# Altium PCB PCB.PcbDoc (part 2 of 3)
Units mil, origin at the board's own origin, x right, y up, seen from the top; angles counter-clockwise.
Board outline 3149.61 x 3937.01 mil, 2 copper layers (Top Layer, Bottom Layer); 240 components, 174 nets, 738 pads, 225 vias.
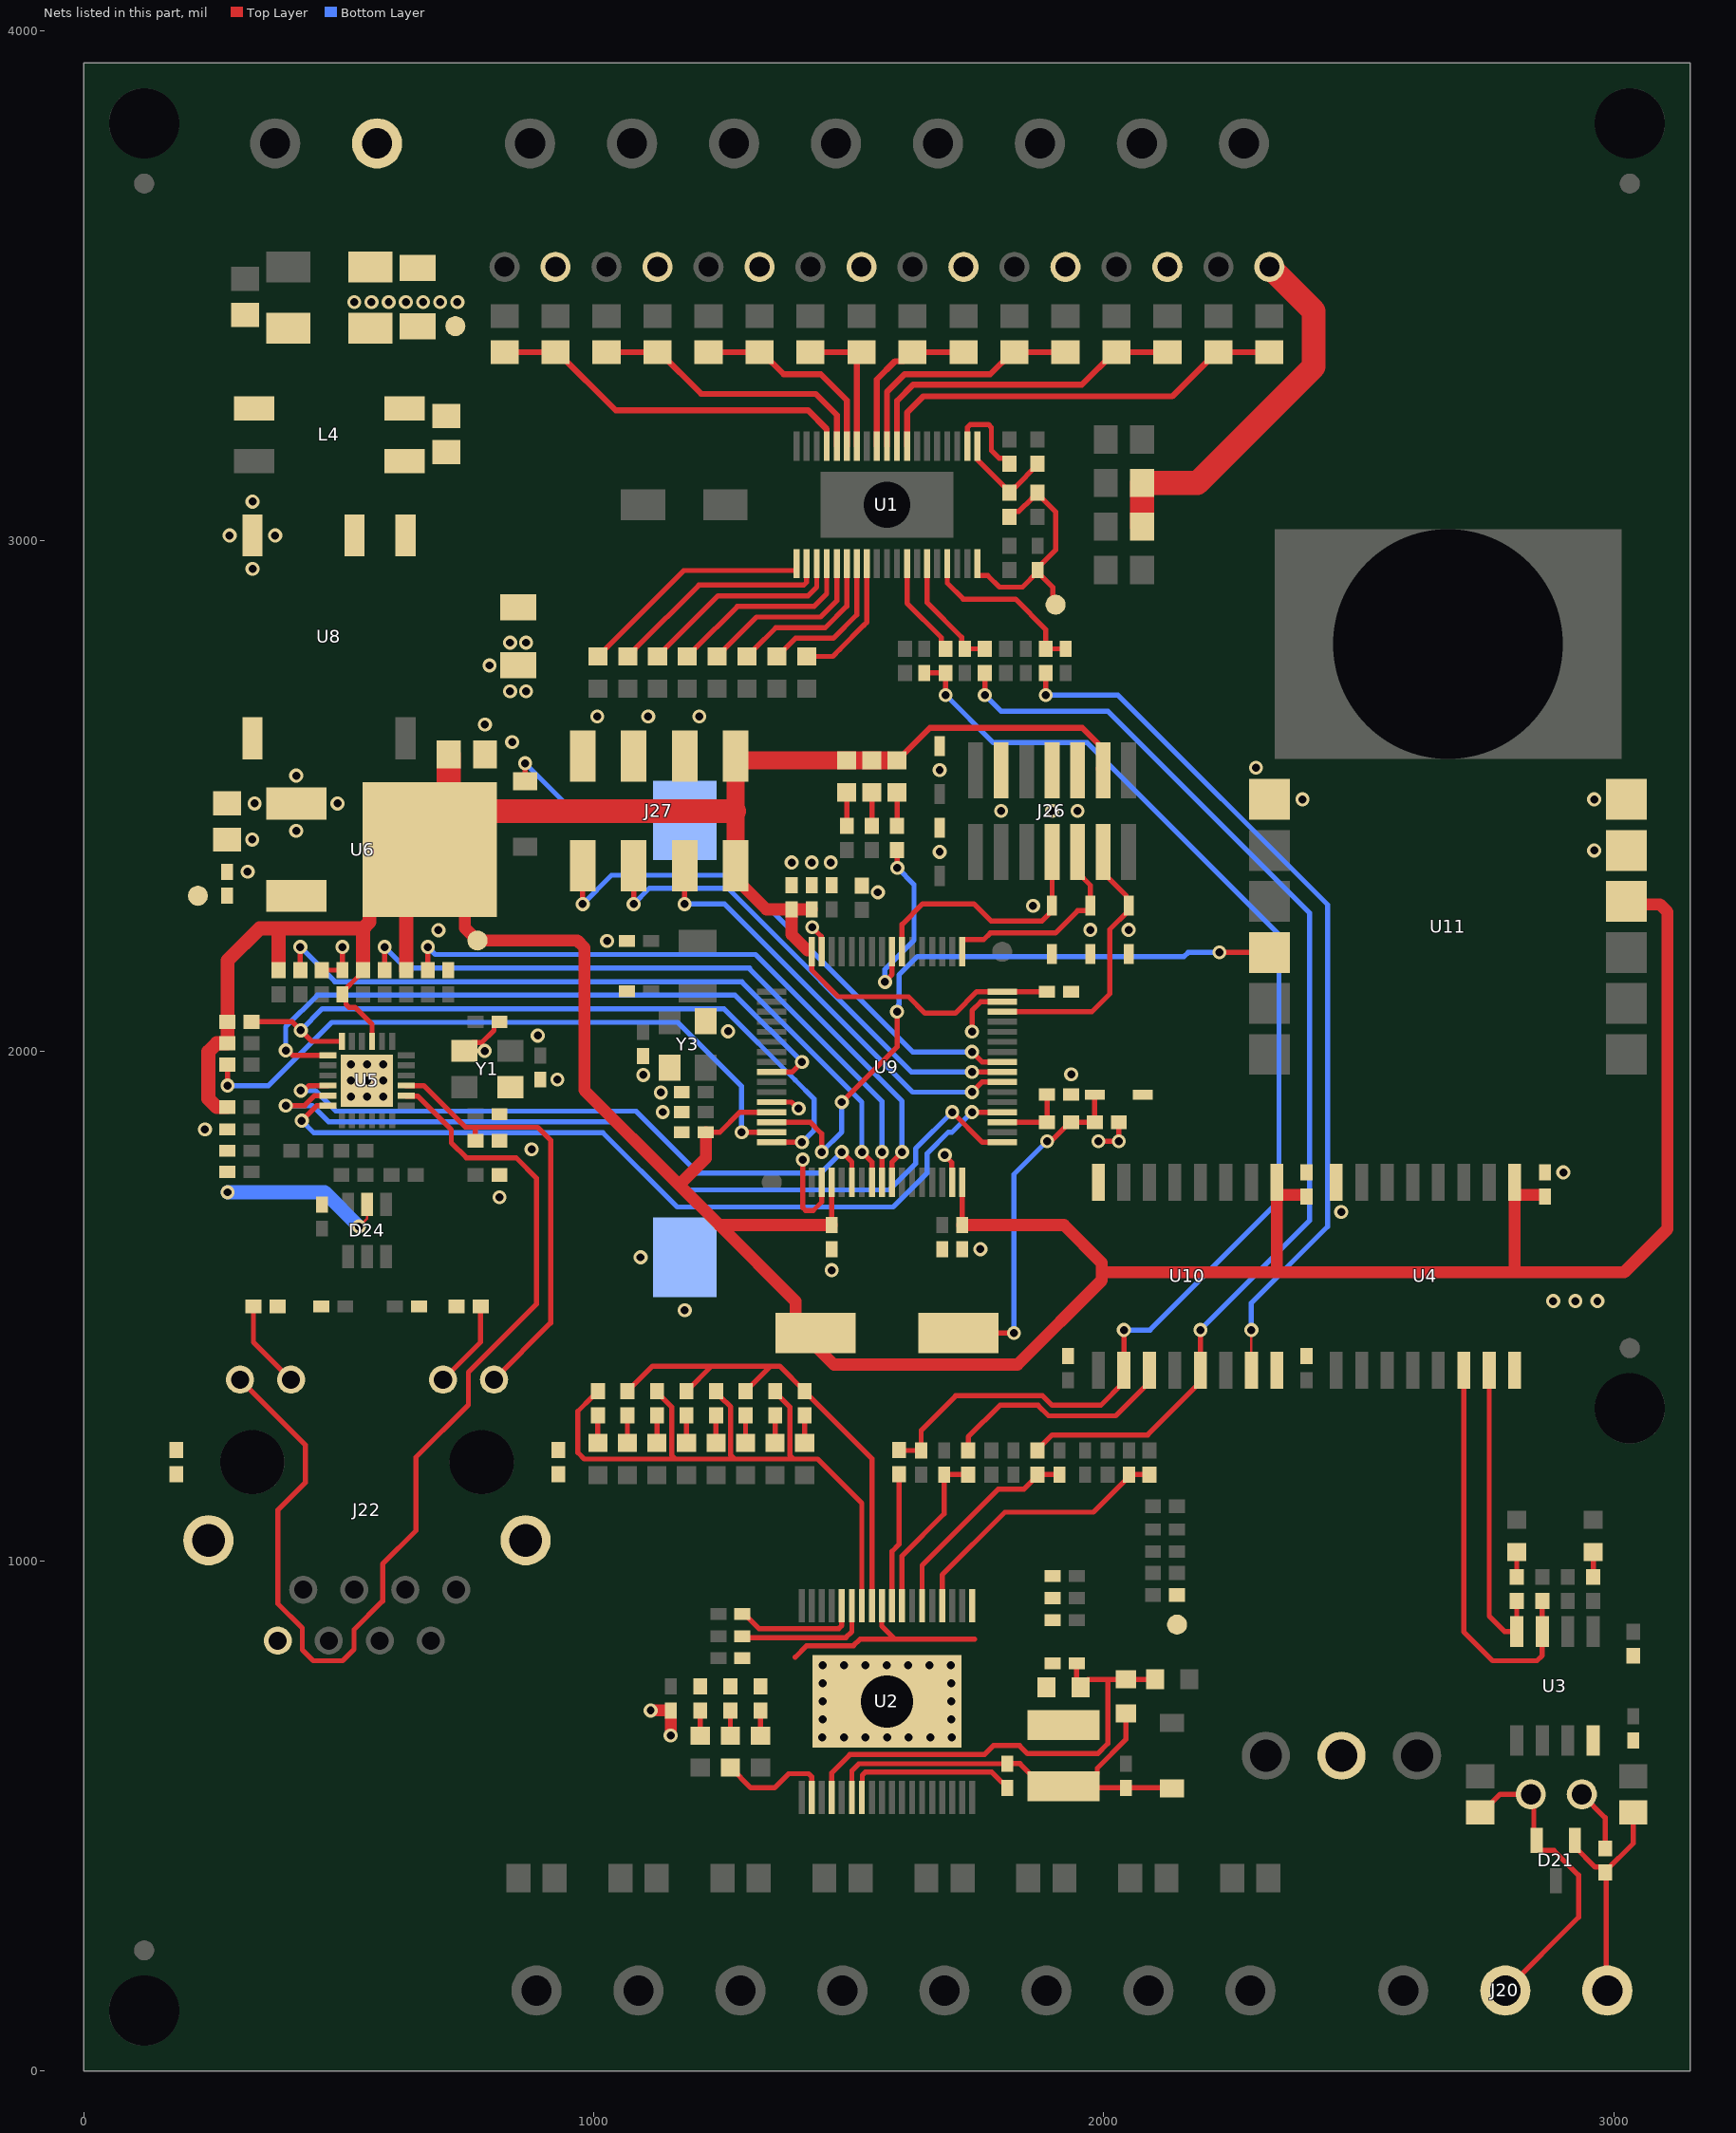
[diagram p2: the nets of this part, all layers, seen from the top]

## Part data (continued)
C77 C78: library part C-MLCC-2.2uF-25V-10%-0402, "Multilayer Ceramic Capacitors MLCC - SMD/SMT 25V 2.2uF X5R 0402 10% HI CV", JLCPCB Part #=C723363, Manufacturer=YAGEO, Part Number=CC0402KRX5R8BB225, Digikey Part #=13-CC0402KRX5R8BB225CT-ND, Mounting Type=SMT, Mouser Part #=603-CC0402KRX5R8B225
D1 D2 D3 D4 D5 D6 D7 D8 D13 D14 D15 D16 D17 D18 D19 D20 D22 D36: library part D-LED-GREEN-2V-20mA-0603, "Standard Single Color LEDs 0603 Green", JLCPCB Part #=C125094, Manufacturer=LITEON, Part Number=LTST-C190KGKT, Digikey Part #=160-1435-1-ND, Mounting Type=SMT, Mouser Part #=859-LTST-C190KGKT
D9 D10 D11 D34: library part D-LED-RED-2V-20mA-0603, "Standard Single Color LEDs 0603 Red", JLCPCB Part #=C94869, Manufacturer=LITEON, Part Number=LTST-C190KRKT, Digikey Part #=160-1436-1-ND, Mounting Type=SMT, Mouser Part #=859-LTST-C190KRKT
D12 D28: library part D-SCH-350mA-40V-SOD123, "Schottky Diodes & Rectifiers 350mA 40V SOD123", JLCPCB Part #=C181204, Manufacturer="Vishay Semiconductors", Part Number=SD103AW-E3-18, Digikey Part #=SD103AW-E3-18CT-ND, Mounting Type=SMT, Mouser Part #=78-SD103AW-E3-18
D21: library part D-CDSOT23-SM712, "ESD Protection Diodes / TVS Diodes SOT-23 7V400W Low Capacitance", JLCPCB Part #=C5122012, Manufacturer=Bourns, Part Number=CDSOT23-SM712, Digikey Part #=CDSOT23-SM712CT-ND, Mounting Type=SMT, Mouser Part #=652-CDSOT23-SM712
D23 D35: library part D-LED-YELLOW-2V-20mA-0603, "Standard Single Color LEDs 0603 Yellow", JLCPCB Part #=C125095, Manufacturer=LITEON, Part Number=LTST-C190KSKT, Digikey Part #=160-1437-1-ND, Mounting Type=SMT, Mouser Part #=859-LTST-C190KSKT
D24: library part D-USBLC6-4SC6, "ESD Protection Diodes / TVS Diodes Low Cap ESD Protect", JLCPCB Part #=C558419, Manufacturer=STMicroelectronics, Part Number=USBLC6-4SC6, Digikey Part #=497-4492-1-ND, Mounting Type=SMT, Mouser Part #=511-USBLC6-4SC6
D25 D26: library part D-SCH-2A-100V-SMA, "Schottky Diodes & Rectifiers 2A 100V SMA", JLCPCB Part #=C14996, Manufacturer=onsemi, Part Number=SSA210, Digikey Part #=SSA210CT-ND, Mounting Type=SMT, Mouser Part #=512-SSA210
D27: library part D-TVS-400W-26V-SMA-BI, "ESD Protection Diodes / TVS Diodes 400W 26V 5% Bi-Directional", JLCPCB Part #=C173517, Manufacturer=Littelfuse, Part Number=SMAJ26CA, Digikey Part #=18-SMAJ26CACT-ND, Mounting Type=SMT, Mouser Part #=576-SMAJ26CA
D29 D30 D31 D32 D33 D37: library part D-TVS-36W-3.3V-SOD323, "ESD Protection Diodes / TVS Diodes UNIDIRECTIONAL 3.3V ESD PR", JLCPCB Part #=C19829399, Manufacturer=onsemi, Part Number=ESD7351HT1G, Digikey Part #=ESD7351HT1GOSCT-ND, Mounting Type=SMT, Mouser Part #=863-ESD7351HT1G
F1: library part F-1206-10A-50V-SMT, "Surface Mount Fuses 1206 high-current met-foil. 10A", JLCPCB Part #=C136354, Manufacturer=Bourns, Part Number=SF-1206HH1000R-2, Digikey Part #=118-SF-1206HH1000R-2CT-ND, Mounting Type=SMT, Mouser Part #=652-SF-1206HH1000R-2
J1 J2 J3 J4 J5 J6 J7 J8 J21: library part J-02-2P54-HDR-M-VERT-TH, "Male straight header, 1 row, 2 positions, 2.54mm pitch, through-hole", JLCPCB Part #=C3324910, Manufacturer="Amphenol FCI", Part Number=10129378-902001BLF, Digikey Part #=10129378-902001BLF-ND, Mounting Type=THT, Mouser Part #=649-1012937890201BLF
J9 J10 J11 J12 J15 J16 J17 J18 J24: library part J-02-5P08-TERM-F-VERT-TH, "Pluggable Terminal Blocks 2 Pos 5.08mm pitch Through Hole Header", JLCPCB Part #=C8475, Manufacturer="Adam Tech", Part Number=EBA-02-D-BU-01, Digikey Part #=ED2609-ND, Mounting Type=THT, Mouser Part #=737-EBA-02-D-BU-01
J20: library part J-03-5P08-TERM-F-VERT-TH, "Pluggable Terminal Blocks 3 Pos 5.08mm pitch Through Hole Header", JLCPCB Part #=C8483, Manufacturer="Adam Tech", Part Number=EBA-03-D-BU-01, Digikey Part #=ED2610-ND, Mounting Type=THT, Mouser Part #=737-EBA-03-D-BU-01
J22: library part J-RJ45-1P-VERT-MAGJACK-SH-LED-THT, "Modular Ethernet Connector Jack (Female) 1x1 Shielded Through Hole With LEDs With Magnetics", JLCPCB Part #=C34677, Manufacturer=HANRUN, Part Number=HY951180A, Digikey Part #=535-12607-ND, Mounting Type=THT, Mouser Part #=815-ARJ07-111071A
J25: library part J-CR2032-H-SMT, "Coin Cell Battery Holders CR2032", JLCPCB Part #=C238070, Manufacturer="Keystone Electronics", Part Number=1061, Digikey Part #=36-1061-ND, Mounting Type=SMT, Mouser Part #=534-1061
J26: library part J-14-1P27-HDR-M-SH-SMT, "Male straight header, 2 row, 14 positions, 1.27mm pitch, SMD", JLCPCB Part #=C7465995, Manufacturer=SAMTEC, Part Number=FTSH-107-01-F-DV-K, Digikey Part #=612-FTSH-107-01-F-DV-K-ND, Mounting Type=SMT, Mouser Part #=200-FTSH10701FDVK
J27: library part J-8-2P54-HDR-M-VERT-SMT, "Male straight header, 2 row, 8 positions, 2.54mm pitch, SMD", JLCPCB Part #=C192300, Manufacturer="Amphenol FCI", Part Number=95278-101-08LF, Digikey Part #=609-5752-ND, Mounting Type=SMT, Mouser Part #=649-95278-101-08LF
L1: library part L-PWR-100uH-0.42A-SMT, "Power Inductors - SMD 100uH 0.42A 1.6Ohms", JLCPCB Part #=C83471, Manufacturer=Bourns, Part Number=SRN4018-101M, Digikey Part #=SRN4018-101MCT-ND, Mounting Type=SMT, Mouser Part #=652-SRN4018-101M
L2: library part L-FB-600R-100MHz-500mA-0402, "Ferrite Beads 600 OHM 25% Alternate Sizing Guide Below", JLCPCB Part #=C76886, Manufacturer="Murata Electronics", Part Number=BLM15AX601SN1D, Digikey Part #=490-5441-1-ND, Mounting Type=SMT, Mouser Part #=81-BLM15AX601SN1D
L4: library part L-CMC-10uH-1.6A-TH, "Common Mode Chokes / Filters WE-SL2 SMD Sectional 2x10uH 1600mA", JLCPCB Part #=C878356, Manufacturer="Wurth Elektronik", Part Number=744226S, Digikey Part #=732-1476-1-ND, Mounting Type=SMT, Mouser Part #=710-744226S
R1 R2 R5 R6 R7 R8 R9 R11: library part R-THICK-2K2-125mW-1%-0805, "Thick Film Resistors - SMD General Purpose Chip Resistor 0805, 2.2kOhms, 1%, 1/8W", JLCPCB Part #=C114561, Manufacturer=YAGEO, Part Number=RC0805FR-072K2L, Digikey Part #=311-2.20KCRCT-ND, Mounting Type=SMT, Mouser Part #=603-RC0805FR-072K2L
R3: library part R-THICK-1K-125mW-1%-0805, "Thick Film Resistors - SMD General Purpose Chip Resistor 0805, 1kOhms, 1%, 1/8W", JLCPCB Part #=C95781, Manufacturer=YAGEO, Part Number=RC0805FR-071KL, Digikey Part #=311-1.00KCRCT-ND, Mounting Type=SMT, Mouser Part #=603-RC0805FR-071KL
R4: library part R-THICK-51K-62.5mW-1%-0402, "Thick Film Resistors - SMD General Purpose Chip Resistor 0402, 51kOhms, 1%, 1/16W", JLCPCB Part #=C107229, Manufacturer=YAGEO, Part Number=RC0402FR-0751KL, Digikey Part #=311-51.0KLRCT-ND, Mounting Type=SMT, Mouser Part #=603-RC0402FR-0751KL
R10: library part R-THICK-15K-62.5mW-1%-0402, "Thick Film Resistors - SMD General Purpose Chip Resistor 0402, 15kOhms, 1%, 1/16W", JLCPCB Part #=C114761, Manufacturer=YAGEO, Part Number=RC0402FR-0715KL, Digikey Part #=311-15.0KLRCT-ND, Mounting Type=SMT, Mouser Part #=603-RC0402FR-0715KL
R12: library part R-THICK-1M-125mW-1%-0805, "Thick Film Resistors - SMD General Purpose Chip Resistor 0805, 1MOhms, 1%, 1/8W", JLCPCB Part #=C107700, Manufacturer=YAGEO, Part Number=RC0805FR-071ML, Digikey Part #=311-1.00MCRCT-ND, Mounting Type=SMT, Mouser Part #=603-RC0805FR-071ML
R13: library part R-THICK-82K-125mW-1%-0805, "Thick Film Resistors - SMD General Purpose Chip Resistor 0805, 82 kOhms, 1%, 1/8W", JLCPCB Part #=C137489, Manufacturer=YAGEO, Part Number=RC0805FR-0782KL, Digikey Part #=311-82.0KCRCT-ND, Mounting Type=SMT, Mouser Part #=603-RC0805FR-0782KL
R14 R15 R16 R17 R21 R25 R26 R27 R28: library part R-THICK-220R-62.5mW-1%-0402, "Thick Film Resistors - SMD General Purpose Chip Resistor 0402, 220Ohms, 1%, 1/16W", JLCPCB Part #=C112291, Manufacturer=YAGEO, Part Number=RC0402FR-07220RL, Digikey Part #=311-220LRCT-ND, Mounting Type=SMT, Mouser Part #=603-RC0402FR-07220RL
R18 R19 R20 R29 R30 R31 R35 R36 R37 R38 R39: library part R-THICK-680R-62.5mW-1%-0402, "Thick Film Resistors - SMD General Purpose Chip Resistor 0402, 680Ohms, 1%, 1/16W", JLCPCB Part #=C137948, Manufacturer=YAGEO, Part Number=RC0402FR-07680RL, Digikey Part #=311-680LRCT-ND, Mounting Type=SMT, Mouser Part #=603-RC0402FR-07680RL
R22: library part R-THICK-2K-100mW-1%-0603, "Thick Film Resistors - SMD General Purpose Chip Resistor 0603, 2kOhms, 1%, 1/10W", JLCPCB Part #=C105576, Manufacturer=YAGEO, Part Number=RC0603FR-072KL, Digikey Part #=311-2.00KHRCT-ND, Mounting Type=SMT, Mouser Part #=603-RC0603FR-072KL
R23: library part R-THICK-10K-100mW-1%-0603, "Thick Film Resistors - SMD General Purpose Chip Resistor 0603, 10kOhms, 1%, 1/10W", JLCPCB Part #=C98220, Manufacturer=YAGEO, Part Number=RC0603FR-0710KL, Digikey Part #=311-10.0KHRCT-ND, Mounting Type=SMT, Mouser Part #=603-RC0603FR-0710KL
R24: library part R-THICK-3K3-100mW-1%-0603, "Thick Film Resistors - SMD General Purpose Chip Resistor 0603, 3.3kOhms, 1%, 1/10W", JLCPCB Part #=C108078, Manufacturer=YAGEO, Part Number=RC0603FR-073K3L, Digikey Part #=311-3.30KHRCT-ND, Mounting Type=SMT, Mouser Part #=603-RC0603FR-073K3L
R32 R33 R34 R40 R43 R44 R53 R54 R55 R56 R65 R72 R79: library part R-THICK-10K-62.5mW-1%-0402, "Thick Film Resistors - SMD General Purpose Chip Resistor 0402, 10kOhms, 1%, 1/16W", JLCPCB Part #=C60490, Manufacturer=YAGEO, Part Number=RC0402FR-0710KL, Digikey Part #=311-10.0KLRCT-ND, Mounting Type=SMT, Mouser Part #=603-RC0402FR-0710KL
R41 R45: library part R-THICK-HP-10R-500mW-1%-0805, "Thick Film Resistors - SMD High Power Chip Resistor 0805, 10Ohms, 1%, 1/2W", JLCPCB Part #=C844598, Manufacturer=Vishay, Part Number=CRCW080510R0FKEAHP, Digikey Part #=541-10.0TCT-ND, Mounting Type=SMT, Mouser Part #=71-CRCW080510R0FKEAH
R42: library part R-THICK-120R-62.5mW-1%-0402, "Thick Film Resistors - SMD General Purpose Chip Resistor 0402, 120Ohms, 1%, 1/16W", JLCPCB Part #=C114758, Manufacturer=YAGEO, Part Number=RC0402FR-07120RL, Digikey Part #=311-120LRCT-ND, Mounting Type=SMT, Mouser Part #=603-RC0402FR-07120RL
R46 R47: library part R-THICK-1K-62.5mW-1%-0402, "Thick Film Resistors - SMD General Purpose Chip Resistor 0402, 1kOhms, 1%, 1/16W", JLCPCB Part #=C106235, Manufacturer=YAGEO, Part Number=RC0402FR-071KL, Digikey Part #=311-1.00KLRCT-ND, Mounting Type=SMT, Mouser Part #=603-RC0402FR-071KL
R49 R50 R51 R52: library part R-THICK-49R9-62.5mW-1%-0402, "Thick Film Resistors - SMD General Purpose Chip Resistor 0402, 49.9Ohms, 1%, 1/16W", JLCPCB Part #=C87044, Manufacturer=YAGEO, Part Number=RC0402FR-0749R9L, Digikey Part #=311-49.9LRCT-ND, Mounting Type=SMT, Mouser Part #=603-RC0402FR-0749R9L
R57: library part R-THICK-1K5-62.5mW-1%-0402, "Thick Film Resistors - SMD General Purpose Chip Resistor 0402, 1.5kOhms, 1%, 1/16W", JLCPCB Part #=C114759, Manufacturer=YAGEO, Part Number=RC0402FR-071K5L, Digikey Part #=311-1.50KLRCT-ND, Mounting Type=SMT, Mouser Part #=603-RC0402FR-071K5L
R58 R59 R64 R67: library part R-THICK-33R-62.5mW-1%-0402, "Thick Film Resistors - SMD General Purpose Chip Resistor 0402, 33Ohms, 1%, 1/16W", JLCPCB Part #=C138002, Manufacturer=YAGEO, Part Number=RC0402FR-0733RL, Digikey Part #=311-33.0LRCT-ND, Mounting Type=SMT, Mouser Part #=603-RC0402FR-0733RL
R68: library part R-THICK-12K1-62.5mW-1%-0402, "Thick Film Resistors - SMD General Purpose Chip Resistor 0402, 12.1kOhms, 1%, 1/16W", JLCPCB Part #=C132157, Manufacturer=YAGEO, Part Number=RC0402FR-0712K1L, Digikey Part #=311-12.1KLRCT-ND, Mounting Type=SMT, Mouser Part #=603-RC0402FR-0712K1L
R69 R70 R80 R81 R82 R83 R84: library part R-THICK-0R-62.5mW-1%-0402, "Thick Film Resistors - SMD General Purpose Chip Resistor 0402, 0Ohms, 1%, 1/16W", JLCPCB Part #=C106231, Manufacturer=YAGEO, Part Number=RC0402FR-070RL, Digikey Part #=311-0.0LRCT-ND, Mounting Type=SMT, Mouser Part #=603-RC0402FR-070RL
R71 R73 R74 R75 R76 R77: library part R-THICK-330R-62.5mW-1%-0402, "Thick Film Resistors - SMD General Purpose Chip Resistor 0402, 330Ohms, 1%, 1/16W", JLCPCB Part #=C105875, Manufacturer=YAGEO, Part Number=RC0402FR-07330RL, Digikey Part #=311-330LRCT-ND, Mounting Type=SMT, Mouser Part #=603-RC0402FR-07330RL
R78: library part R-THICK-100K-62.5mW-1%-0402, "Thick Film Resistors - SMD General Purpose Chip Resistor 0402, 100kOhms, 1%, 1/16W", JLCPCB Part #=C60491, Manufacturer=YAGEO, Part Number=RC0402FR-07100KL, Digikey Part #=311-100KLRCT-ND, Mounting Type=SMT, Mouser Part #=603-RC0402FR-07100KL
S1: library part S-TACT-NO-6x3.5-SMT, "Tactile Switches SMD OFF - (ON)", JLCPCB Part #=C3012022, Manufacturer="TE Connectivity", Part Number=FSMSM, Digikey Part #=450-1140-ND, Mounting Type=SMT, Mouser Part #=506-FSMSM
TP1 TP2 TP3 TP7 TP8: library part TP-1MM-SMD, "Test point, 1mm, exposed pad", JLCPCB Part #=C5199810, Mounting Type=SMD
TP4 TP5 TP6: library part TP-LOOP-D3.2-P1.60-BLK-TH, "Test point black, Mtg Hole 1.6, loop 3.2mm", JLCPCB Part #=C2906764, Manufacturer="Keystone Electronics", Part Number=5006, Digikey Part #=36-5006-ND, Mounting Type=THT, Mouser Part #=534-5006
U1: library part U-SCLT3-8BT8, "I/O Controller Interface IC 8-Line Protected Digital Serial", JLCPCB Part #=C1519056, Manufacturer=STMicroelectronics, Part Number=SCLT3-8BT8, Digikey Part #=497-10100-5-ND, Mounting Type=SMT, Mouser Part #=511-SCLT3-8BT8
U2: library part U-VNI8200XP-32, "Power Switch ICs - Power Distribution 8-Ch Octal HS SSR 100mA VIPower", JLCPCB Part #=C1556834, Manufacturer=STMicroelectronics, Part Number=VNI8200XP-32, Digikey Part #=497-VNI8200XP-32-ND, Mounting Type=SMT, Mouser Part #=511-VNI8200XP-32
U3: library part U-SN65HVD82DR, "RS-485 Interface IC 5V-Supply", JLCPCB Part #=C73631, Manufacturer="Texas Instruments", Part Number=SN65HVD82DR, Digikey Part #=296-35043-1-ND, Mounting Type=SMT, Mouser Part #=595-SN65HVD82DR
U4 U10: library part U-SI8661BC-B-IS1, "Digital Isolators 3.75 kV 5 forward & 1 reverse 6-channel isolator", JLCPCB Part #=C528656, Manufacturer=Skyworks, Part Number=SI8661BC-B-IS1, Digikey Part #=336-2120-5-ND, Mounting Type=SMT, Mouser Part #=634-SI8661BC-B-IS1
U5: library part U-LAN8742A, "Ethernet PHY transceiver 10/100-Mbps", JLCPCB Part #=C621424, Manufacturer=Microchip, Part Number=LAN8742A-CZ-TR, Digikey Part #=LAN8742A-CZ-CT-ND, Mounting Type=SMT, Mouser Part #=579-LAN8742A-CZ-TR
U6: library part U-LD1117DT33CTR, "LDO Voltage Regulators 3.3V 0.8A Positive", JLCPCB Part #=C36395, Manufacturer=STMicroelectronics, Part Number=LD1117DT33CTR, Digikey Part #=497-1235-1-ND, Mounting Type=SMT, Mouser Part #=511-LD1117DT33C-TR
U8: library part U-1769405341-SMD, "Isolated DC/DC Converters - SMD WPME-FISM SMT-8 Modu 24Vin 5Vout 2W 3kV", JLCPCB Part #=C6978530, Manufacturer="Wurth Elektronik", Part Number=1769405341, Digikey Part #=732-1769405341CT-ND, Mounting Type=SMT, Mouser Part #=710-1769405341
U9: library part U-STM32H563RI, "ARM Microcontrollers - MCU Arm Cortex-M33 32-bit 250 MHz 2 Mbytes Flash 640KB RAM I3C, DCMI, Ethernet, SMPS", JLCPCB Part #=C20619634, Manufacturer=STMicroelectronics, Part Number=STM32H563RIT6, Digikey Part #=497-STM32H563RIT6-ND, Mounting Type=SMT, Mouser Part #=511-STM32H563RIT6
U11: library part U-MRF24J40MA, "Zigbee Modules - 802.15.4 2.4GHz IEEE 802.15.4 Transceiver Module", JLCPCB Part #=C641083, Manufacturer=Microchip, Part Number=MRF24J40MA-I/RM, Digikey Part #=MRF24J40MA-I/RM-ND, Mounting Type=SMT, Mouser Part #=579-MRF24J40MA-I/RM
Y1 Y3: library part Y-XTAL-25MHz-12pF-20ppm-3225-SMT, "Crystals 25MHz 12pF 20ppm -40C +125C", JLCPCB Part #=C91750, Manufacturer=ECS, Part Number=ECS-250-12-33Q-JES-TR, Digikey Part #=XC2151CT-ND, Mounting Type=SMT, Mouser Part #=520-250-12-33Q-JEST
Y2: library part Y-XTAL-32.768kHz-12pF-20ppm-3215-SMT, "Crystals 32.768KHz 20ppm 12.5pF -40C +85C", JLCPCB Part #=C32346, Manufacturer=ECS, Part Number=ECS-.327-12.5-34B-TR, Digikey Part #=50-ECS-.327-12.5-34B-TRCT-ND, Mounting Type=SMT, Mouser Part #=520-327-12.5-34B

## Free pads (board coordinates)
  round 137.8 hole 137.8 unplated: H1(118.11,3818.9) H2(3031.5,3818.9) H3(118.11,118.11) H4(3031.5,1299.21)
  rect 680.32x450.31 hole 450.31 square unplated: H5(2675.24,2798.15)
  round 39.37 smd: ""(118.11,236.22) ""(118.11,3700.79) ""(3031.5,1417.32) ""(3031.5,3700.79)
  round 39.37 smd far side: ""(118.11,236.22) ""(118.11,3700.79) ""(3031.5,1417.32) ""(3031.5,3700.79)

## Via types
v1: diameter 27.56, hole 15.75, Top Layer to Bottom Layer, tented both sides, 225 vias

## Nets (pads, with @x,y where several pads share a name; then routed paths per layer and width w, separated by ;. In a path a pad name is that pad's centre, name@x,y a point inside that pad or via, vN(x,y) a via of type N, cw(c..) or ccw(c..) an arc to the next point about the centre after c; other vN are vias at no path point)
3V3: C42.1 C51.1 C58.1 C66.1 C71.1 C72.1 C73.1 C74.1 C75.1 C76.1 D34.A D35.A D36.A J26.3 J27.1 J27.2 L2.1 R53.2 R54.2 R55.2 R56.2 R57.2 S1.2 TP3.1 U4.1 U5.9 U6.3 U9.13 U9.19 U9.32 U9.48 U9.64 U10.1 U11.10 | length 9338.7
  Top Layer w10: R54.2@547.24,2158.46 538.46,2149.68 538.46,2146.73 506.89,2115.16 C51.1@506.89,2111.22 513.7,2104.41 513.7,2091.49 519.56,2085.63 531.5,2085.63 564.95,2052.17 U5.9@564.95,2018.7 ; C76.1@1219.49,1840.55 1247.05,1840.55 1286.42,1879.92 U9.13@1348.9,1879.92 ; U9.64@1427.17,2194.41 1427.27,2194.3 1427.27,2158.36 1479.33,2106.3 1617.13,2106.3 1649.61,2073.82 1708.66,2073.82 1750.98,2116.14 U9.48@1800.71,2116.14 C74.1@1888.78,2116.14 ; C72.1@1466.54,1658.46 U9.19@1466.54,1742.6 ; C73.1@1722.44,1658.46 U9.32@1722.44,1742.6
  Top Layer w11.81: D36.A@1595.47,2569.88 1658.86,2633.27 1957.7,2633.27 J26.3@1995.87,2595.11
  Top Layer w23.62: U6.3@678.15,2394.69 747.02,2325.82 747.02,2241.2 TP3.1@771.68,2216.54 ; TP3.1@788.76,2216.54 967.46,2216.54 981.3,2202.7 981.3,1923.23 1167.32,1737.2 ; C76.1@1219.49,1840.55 1219.49,1789.37 1167.32,1737.2 ; J27.2@1278.03,2362.99 1278.03,2337.99 1338.46,2277.56 C71.1@1387.8,2277.56 ; 1419.29,2196.85 1387.8,2228.35 C71.1@1387.8,2277.56 ; C75.1@1427.17,2277.56 C71.1@1387.8,2277.56 ; C72.1@1466.54,1658.46 1246.06,1658.46 ; D36.A@1594.49,2569.88 D36.A@1595.47,2569.88 ; C73.1@1722.44,1658.46 1922.05,1658.46 1996.06,1584.45 1996.06,1565.94 ; J26.3@1995.87,2553.35 J26.3@1998.62,2550.59 ; U10.1@2339.37,1742.13 U10.1@2339.37,1718.5 ; C66.1@2397.64,1714.57 2397.64,1717.52 2340.35,1717.52 U10.1@2339.37,1718.5 ; U4.1@2805.9,1742.13 U4.1@2805.9,1718.5 ; C42.1@2865.16,1714.57 2865.16,1717.52 2806.89,1717.52 U4.1@2805.9,1718.5 ; U11.10@3025.24,2293.15 3030.98,2287.4 3090.55,2287.4 3105.31,2272.64 3105.31,1650.59 3020.67,1565.94 2805.9,1565.94 ; 1167.32,1737.2 1246.06,1658.46 ; 1246.06,1658.46 1395.67,1508.86 1395.67,1446.85 1408.86,1446.85 1470.87,1384.84 1830.71,1384.84 1996.06,1550.2 1996.06,1565.94 ; 1996.06,1565.94 2339.37,1565.94 ; 2339.37,1565.94 2805.9,1565.94 ; 2339.37,1565.94 U10.1@2339.37,1718.5 ; 2805.9,1565.94 U4.1@2805.9,1718.5
  Top Layer w27.56: L2.1@281.5,1889.76 260.24,1889.76 244.09,1905.91 244.09,1998.62 260.24,2014.76 R53.2@281.5,2014.76 R57.2@281.5,2057.09 281.5,2177.17 344.49,2240.16 381.89,2240.16 ; R56.2@381.89,2158.46 381.89,2240.16 ; R54.2@547.24,2158.46 547.24,2240.16 ; R55.2@631.89,2158.46 631.89,2230.31 U6.3@631.89,2348.42 ; U6.3@678.15,2394.69 U6.3@631.89,2348.42 ; 381.89,2240.16 547.24,2240.16 ; 547.24,2240.16 560.04,2252.96 560.04,2276.57 U6.3@631.89,2348.42
  Top Layer w35.43: 1274.61,2470.08 1278.03,2473.5 ; J27.2@1278.03,2362.99 1278.03,2473.5 ; J27.1@1278.03,2577.95 J27.1@1278.03,2577.17 ; 1574.8,2569.88 D35.A@1545.27,2569.88 1285.31,2569.88 J27.1@1278.03,2577.17 ; 1278.03,2473.5 J27.1@1278.03,2577.17
  Top Layer w47.24: U6.3@678.15,2394.69 U6.3@715.56,2432.09 ; C58.1@715.56,2581.69 U6.3@715.56,2432.09 ; 1274.61,2470.08 753.55,2470.08 U6.3@715.56,2432.09
5V: C57.1 C63.1 TP2.1 U6.2 U8.5
24V: C15.1 D26.A D27.2 F1.2 J1.2 J2.2 J3.2 J4.2 J5.2 J6.2 J7.2 J8.2 R3.1 R12.1 TP1.1 U2.37 | length 942.2
  Top Layer w10: U2.37@1500,799.21 U2.37@1574.8,724.41
  Top Layer w23.62: v1(1111.33,706.69) C15.1@1150.59,706.69 v1(1150.59,657.71)
  Top Layer w47.24: R3.1@2074.8,3028.22 R12.1@2074.8,3113.52 2183.4,3113.52 2411.42,3341.54 2411.42,3450.9 J8.2@2324.8,3537.51
  other v1: 1448.13,653.64 1490.46,653.64 1532.78,653.64 1575.1,653.64 1617.42,653.64 1659.75,653.64 1702.07,653.64 1448.91,689.02 1700.69,689.02 1448.91,724.41 1700.69,724.41 1448.91,759.79 1700.69,759.79 1449.12,795.18 1490.95,795.18 1532.78,795.18 1574.61,795.18 1616.44,795.18 1658.27,795.18 1700.1,795.18 530.17,3468.5 563.86,3468.5 597.54,3468.5 631.23,3468.5 664.91,3468.5 698.6,3468.5 732.28,3468.5
+5V_CLT: C4.1 R80.2 R82.2 TP7.1 U1.38 | length 501.3
  Top Layer w10: U1.38@1751.97,2955.71 1751.97,2933.07 1752.87,2932.17 1772.56,2932.17 1795.28,2909.45 1840.55,2909.45 C4.1@1870.08,2938.98 ; R82.2@1814.96,3047.24 1814.96,3049.21 1823.74,3057.99 1833.58,3057.99 1859.33,3083.74 1861.3,3083.74 R80.2@1870.08,3092.52 ; R80.2@1870.08,3094.49 R80.2@1870.08,3092.52 ; TP7.1@1905.51,2875 1899.89,2880.62 1899.89,2909.16 C4.1@1870.08,2938.98 ; C4.1@1870.08,2938.98 C4.1@1870.08,2942.91 1870.08,2946.85 1905.51,2982.28 1905.51,3057.09 R80.2@1870.08,3092.52
+5V_VNI: C16.1 C27.1 C28.1 C31.1 C32.1 C41.1 C43.1 C67.1 L1.2 R18.2 R19.2 R20.2 R22.2 R40.2 R84.2 TP8.1 U2.1 U2.10 U3.8 U4.16 U10.16 | length 441.8
  Top Layer w10: 1394.68,811.02 1417.32,833.66 1508.86,833.66 1521.65,846.46 1747.05,846.46 ; U2.10@1564.96,912.4 1564.58,912.02 1564.58,872.42 1589.07,847.93
A: D21.2 J20.2 J21.1 R45.2 | length 612.9
  Top Layer w10: R45.2@2738.19,506.89 2742.13,506.89 2777.56,542.32 J21.1@2837.48,542.32 2843.29,536.52 2843.29,457.58 D21.2@2849.09,451.77 2849.09,438.98 2855.91,432.17 2882.84,432.17 2931.1,383.91 2931.1,301.1 J20.2@2787.48,157.48
B: D21.1 J20.3 R41.2 R42.2 | length 468.1
  Top Layer w10: D21.1@2923.9,451.77 2923.9,438.98 2963.35,399.53 2974.49,399.53 R42.2@2983.27,390.75 ; R42.2@2983.27,388.78 R42.2@2983.27,390.75 ; J20.3@2987.48,157.48 2985.37,159.59 2985.37,388.64 R42.2@2983.27,390.75 ; R41.2@3038.38,506.89 3038.38,445.87 R42.2@2983.27,390.75
BUTTON: C64.1 R74.1 U9.35 | length 142.2
  Top Layer w10: U9.35@1800.71,1860.24 R74.1@1888.78,1860.24 C64.1@1888.78,1914.37
COL0: R29.2 R31.2 R36.2 R38.2 U2.11 | length 1009.5
  Top Layer w10: R38.2@1065.8,1330.71 R38.2@1065.8,1332.68 1115.02,1381.89 1230.88,1381.89 ; R36.2@1181.66,1330.71 R36.2@1181.66,1332.68 1230.88,1381.89 ; R31.2@1297.52,1330.71 R31.2@1297.52,1332.68 1346.74,1381.89 ; U2.11@1545.28,912.4 1545.28,1200.79 1424.13,1321.93 1422.16,1321.93 1413.38,1330.71 R29.2@1413.38,1332.68 1364.17,1381.89 1346.74,1381.89 ; 1230.88,1381.89 1346.74,1381.89
COL1: R30.2 R35.2 R37.2 R39.2 U2.12 | length 1374.7
  Top Layer w10: R39.2@1007.87,1332.68 1007.87,1330.71 999.09,1321.93 997.13,1321.93 968.5,1293.31 968.5,1212.6 981.33,1199.77 1160.15,1199.77 ; R37.2@1123.73,1330.71 1132.51,1321.93 1152.43,1302.01 1152.43,1207.49 1160.15,1199.77 ; R35.2@1239.59,1330.71 1248.37,1321.93 1268.3,1302.01 1268.3,1207.49 1276.01,1199.77 ; R30.2@1355.45,1330.71 1364.23,1321.93 1384.16,1302.01 1384.16,1207.49 1391.87,1199.77 ; U2.12@1525.59,912.4 1525.59,1113.21 1439.02,1199.77 1391.87,1199.77 ; 1160.15,1199.77 1276.01,1199.77 ; 1276.01,1199.77 1391.87,1199.77
CS1: R15.1 U10.15 | length 1741
  Top Layer w5: U10.15@2289.37,1374.02 v1(2289.37,1452.76)
  Top Layer w10: v1(1886.07,2697.88) R15.1@1886.07,2741.17
  Bottom Layer w10: v1(1886.07,2697.88) 2027.51,2697.88 2438.98,2286.42 2438.98,1655.51 2289.37,1505.91 v1(2289.37,1452.76)
CS2: R26.1 U10.11 | length 466.9
  Top Layer w10: R26.1@1734.25,1216.54 1734.25,1243.11 1796.26,1305.12 1871.06,1305.12 1891.73,1284.45 2023.42,1284.45 2089.37,1350.39 U10.11@2089.37,1374.02
CS_CLT: C12.1 R15.2 U1.35 | length 346.4
  Top Layer w10: U1.35@1692.91,2955.71 1692.91,2917.32 1724.41,2885.83 1826.77,2885.83 1886.07,2826.53 R15.2@1886.07,2788.42 C12.1@1925.2,2788.42
CS_VNI: C35.1 R26.2 U2.8 | length 338.4
  Top Layer w10: U2.8@1604.33,912.4 1604.33,1009.84 1687,1092.52 C35.1@1687,1169.29 R26.2@1734.25,1169.29
D: R47.2 U3.4 U4.15 | length 609
  Top Layer w10: U4.15@2755.9,1374.02 2755.9,1230.32 2755.9,891.73 2786.42,861.22 U3.4@2809.92,861.22 R47.2@2809.92,921.26
DBG_SWCLK: D32.C J26.6 U9.49 | length 421.1
  Top Layer w10: U9.49@1722.44,2194.41 1722.44,2217.54 1723.35,2218.44 1764.69,2218.44 1777.55,2231.3 1905.08,2231.3 1948.62,2274.84 1968.78,2274.84 1973.62,2279.68 D32.C@1973.62,2284.68 1973.62,2325 1948.62,2350 J26.6@1948.62,2390.35
DBG_SWDIO: D31.C J26.4 U9.46 | length 539.9
  Top Layer w10: U9.46@1800.71,2076.77 1976.38,2076.77 2011.81,2112.2 2011.81,2238.03 2048.62,2274.84 D31.C@2048.62,2284.68 2043.78,2289.52 2043.78,2304.84 1998.62,2350 J26.4@1998.62,2390.35
DBG_SWO: D33.C J26.8 U9.55 | length 502.4
  Top Layer w10: U9.55@1604.33,2194.41 1604.33,2248.08 1644.64,2288.39 1745.08,2288.39 1778.54,2254.92 1878.94,2254.92 1893.78,2269.76 1893.78,2279.84 D33.C@1898.62,2284.68 J26.8@1898.62,2390.35
DE: R44.2 U3.3 U4.14 | length 801.5
  Top Layer w10: U4.14@2705.9,1374.02 2705.9,861.03 2762.8,804.13 2849.41,804.13 2859.92,814.65 U3.3@2859.92,861.22 R44.2@2859.92,921.26
DVR: R82.1 R83.2 U1.1 | length 196.7
  Top Layer w10: U1.1@1751.97,3186.02 1752.87,3185.12 1752.87,3158.54 R82.1@1814.96,3096.46 ; R82.1@1814.96,3094.49 R82.1@1814.96,3096.46 ; R83.2@1870.08,3151.57 1870.08,3149.61 1825.71,3105.24 1823.74,3105.24 R82.1@1814.96,3096.46
EARTH: J22.8 J22.MH1 J22.MH2 R69.2 R70.2
ETH_CRS_DV: R67.2 U9.23 | length 1437.3
  Top Layer w10: R67.2@424.21,2158.46 v1(424.21,2203.71) ; v1(1525.59,1801.65) 1545.28,1781.97 U9.23@1545.28,1742.6
  Bottom Layer w10: v1(424.21,2203.71) 492.1,2135.83 1290.35,2135.83 ; 1290.35,2134.84 1525.59,1899.61 v1(1525.59,1801.65)
ETH_MDC: U5.13 U9.9 | length 1292.4
  Top Layer w10: v1(395.67,2000.98) 400.04,2000.98 409.88,1991.14 U5.13@478.34,1991.14 ; U9.9@1348.9,1958.66 1388.27,1958.66 v1(1407.95,1978.35)
  Bottom Layer w10: v1(395.67,2000.98) 395.67,2047.24 457.68,2109.25 1277.05,2109.25 v1(1407.95,1978.35)
ETH_MDIO: R57.1 U5.12 U9.16 | length 1444.6
  Top Layer w10: R57.1@328.74,2057.09 408.47,2057.09 v1(425.2,2040.35) 446.85,2018.7 U5.12@505.9,2018.7 ; U9.16@1348.9,1820.87 v1(1407.95,1820.87)
  Bottom Layer w10: v1(425.2,2040.35) 467.52,2082.68 1254.92,2082.68 1394.68,1942.91 1432.09,1905.51 1432.09,1845 v1(1407.95,1820.87)
ETH_REF_CLK: R58.2 U9.15 | length 1301.8
  Top Layer w10: v1(281.5,1932.09) R58.2@281.5,1973.1 ; v1(1289.84,1840.55) U9.15@1348.9,1840.55
  Bottom Layer w10: v1(281.5,1932.09) 362.2,1932.09 486.22,2056.1 1164.37,2056.1 1289.84,1930.63 v1(1289.84,1840.55)
ETH_RXD0: R59.2 U9.24 | length 1304.4
  Top Layer w10: R59.2@589.57,2158.46 v1(589.57,2203.71) ; U9.24@1564.96,1742.6 v1(1564.96,1801.65)
  Bottom Layer w10: v1(589.57,2203.71) 630.88,2162.4 1305.12,2162.4 ; 1305.12,2161.42 1564.96,1901.57 v1(1564.96,1801.65)
ETH_RXD1: R64.2 U9.25 | length 1267.6
  Top Layer w10: R64.2@674.21,2158.46 v1(674.21,2203.71) ; U9.25@1584.65,1742.6 1584.65,1781.97 v1(1604.33,1801.65)
  Bottom Layer w10: v1(674.21,2203.71) 688.95,2188.98 1316.93,2188.98 1604.33,1901.57 v1(1604.33,1801.65)
ETH_TX_EN: U5.16 U9.21 | length 1269.2
  Top Layer w10: v1(425.2,1922.24) 431.3,1922.24 441.14,1932.09 U5.16@478.34,1932.09 ; v1(1486.22,1801.65) 1505.91,1781.97 U9.21@1505.91,1742.6
  Bottom Layer w10: v1(425.2,1922.24) 425.43,1922.01 453.98,1922.01 494.09,1881.89 1082.68,1881.89 1203.74,1760.83 1445.39,1760.83 v1(1486.22,1801.65)
ETH_TXD0: U5.17 U9.33 | length 1669.3
  Top Layer w10: v1(395.67,1892.72) 433.07,1892.72 452.76,1912.4 U5.17@478.34,1912.4 ; v1(1702.76,1879.92) 1761.81,1820.87 U9.33@1800.71,1820.87
  Bottom Layer w10: v1(395.67,1892.72) 447.83,1892.72 479.33,1861.22 1047.24,1861.22 1181.1,1727.36 1579.72,1727.36 1630.91,1778.54 1630.91,1808.07 v1(1702.76,1879.92)
ETH_TXD1: U5.18 U9.36 | length 1606.6
  Top Layer w10: v1(427.17,1863.19) 456.69,1892.72 U5.18@478.34,1892.72 ; v1(1741.65,1879.92) U9.36@1800.71,1879.92
  Bottom Layer w10: v1(427.17,1863.19) 450.79,1839.57 1017.72,1839.57 1163.39,1693.9 1586.61,1693.9 1653.54,1760.83 1653.54,1799.21 1694.88,1840.55 1702.28,1840.55 v1(1741.65,1879.92)
FAULT: D10.C U2.20 | length 230.3
  Top Layer w10: D10.C@1267.72,594.49 1268.7,594.49 1308.07,555.12 1354.33,555.12 1381.89,582.68 1421.26,582.68 1427.54,576.39 1427.54,536.8 U2.20@1427.17,536.42
GND: C42.2 C45.2 C46.2 C48.2 C49.2 C50.2 C51.2 C52.2 C53.2 C54.2 C55.2 C56.1 C57.2 C58.2 C60.2 C63.2 C64.2 C65.2 C66.2 C68.2 C69.2 C70.2 C71.2 C72.2 C73.2 C74.2 C75.2 C76.2 C77.2 C78.2 C79.1 D24.2 D29.A D30.A D31.A D32.A D33.A D37.A J25.1 J26.5 J26.7 J26.11 J27.3 J27.5 J27.7 R65.2 R68.1 R69.1 R70.1 R71.2 R72.1 R73.1 R78.1 R79.1 TP6.1 U4.8 U5.25 U6.1 U8.4 U9.12 U9.18 U9.31 U9.47 U9.63 U10.8 U11.1 U11.11 U11.12 Y1.2 Y1.4 Y3.2 Y3.4 | length 1062.7
  Top Layer w3.94: R78.1@2025.59,1864.17 R78.1@2027.56,1862.2
  Top Layer w5: v1(539.37,1655.51) 555.32,1671.46 D24.2@555.32,1698.82
  Top Layer w10: R65.2@466.53,2158.46 C51.2@506.89,2158.46 v1(506.89,2203.71) ; Y1.4@746.06,2000 762.72,2016.65 780.43,2016.65 804.21,2040.43 804.21,2050.27 811.02,2057.09 C53.2@814.96,2057.09 ; U9.12@1348.9,1899.61 1387.69,1899.61 1400.13,1887.17 v1(1401.66,1887.17) ; v1(1409.54,1786.78) 1409.54,1692.87 1415.39,1687.01 1430.12,1687.01 1446.85,1703.74 U9.18@1446.85,1742.6 ; v1(1428.24,2242.49) 1445.94,2224.78 1445.94,2195.31 U9.63@1446.85,2194.41 ; v1(1688.08,1795.71) 1688.08,1794.85 1701.85,1781.08 1701.85,1743.5 U9.31@1702.76,1742.6 ; v1(1741.65,2037.76) 1741.65,2079.25 1758.86,2096.46 U9.47@1800.71,2096.46 ; v1(1989.37,1822.85) v1(2029.53,1822.85) R78.1@2029.53,1860.24 R78.1@2027.56,1862.2
  Bottom Layer w27.56: v1(281.5,1722.8) 472.08,1722.8 v1(539.37,1655.51)
  other v1: 1178.15,1491.5 2881.48,1509.57 2924.79,1509.57 2968.1,1509.57 1466.54,1569.88 1091.62,1595.28 1757.96,1611.22 2465.64,1684.06 814.96,1712.96 2901.17,1761.81 877.95,1807.09 237.29,1846.13 1135.22,1880.06 523.71,1910.53 555.11,1910.53 586.51,1910.53 1131.28,1918.44 523.71,1941.93 555.11,1941.93 586.51,1941.93 928.53,1943.9 1096.83,1952.89 1936.02,1954.1 523.71,1973.33 555.11,1973.33 586.51,1973.33 785.81,2000 889.96,2030.02 1263.17,2038.38 1025.97,2215.55 695.08,2236.72 1973.62,2237.44 2048.62,2237.44 1861.31,2284.53 1557.09,2311.02 320.95,2351.38 1387.8,2369.45 1427.17,2369.45 1464.57,2369.45 1678.15,2390.35 2961.7,2393.15 329.81,2414.37 416.34,2431.46 1798.62,2470.47 1898.62,2470.47 1948.62,2470.47 334.73,2485.24 497.13,2485.24 2389.76,2493.15 2961.7,2493.15 416.34,2539.73 1678.15,2550.59 2298.31,2555.48 839.65,2605.54 786.42,2640.12 1006.57,2655.87 1106.57,2655.87 1206.57,2655.87 835.72,2705.09 867.03,2705.09 795.28,2755.91 835.72,2800.56 867.03,2800.56 330.71,2945.24 285.52,3010.83 375.09,3010.83 330.71,3077.13
GPIO0: J27.8 U9.41 | length 1072.7
  Top Layer w10: v1(978.03,2288.01) J27.8@978.03,2362.99 ; v1(1741.65,1998.03) 1761.34,1978.35 U9.41@1800.71,1978.35
  Bottom Layer w10: v1(978.03,2288.01) 1034.5,2344.49 1278.54,2344.49 1625,1998.03 v1(1741.65,1998.03)
GPIO1: J27.6 U9.40 | length 959.7
  Top Layer w10: v1(1078.03,2288.01) J27.6@1078.03,2362.99 ; v1(1741.65,1958.66) U9.40@1800.71,1958.66
  Bottom Layer w10: v1(1078.03,2288.01) 1108.91,2318.9 1262.8,2318.9 1623.03,1958.66 v1(1741.65,1958.66)
GPIO2: J27.4 U9.39 | length 858.5
  Top Layer w10: v1(1178.03,2288.01) J27.4@1178.03,2362.99 ; v1(1741.65,1919.29) 1761.34,1938.98 U9.39@1800.71,1938.98
  Bottom Layer w10: v1(1178.03,2288.01) 1256.28,2288.01 1625,1919.29 v1(1741.65,1919.29)
GR_LED: R77.1 U9.56 | length 360.6
  Top Layer w10: v1(1570.87,2135.35) 1570.87,2136.59 1584.65,2150.37 U9.56@1584.65,2194.41 ; R77.1@1594.49,2393.7 1594.76,2393.43 1594.76,2359.27 v1(1595.04,2358.99)
  Bottom Layer w10: v1(1570.87,2135.35) 1570.87,2160.11 1627.95,2217.19 1627.95,2326.08 v1(1595.04,2358.99)
IN1: C10.1 R11.2 U1.8 | length 825.5
  Top Layer w11.81: U1.8@1614.17,3186.02 1614.17,3251.97 1645.67,3283.46 2134.25,3283.46 2220.87,3370.08 R11.2@2224.8,3370.08 C10.1@2324.8,3370.08
IN2: C9.1 R9.2 U1.9 | length 658.4
  Top Layer w11.81: U1.9@1594.49,3186.02 1594.49,3274.61 1625.98,3306.1 1956.89,3306.1 2020.87,3370.08 R9.2@2024.8,3370.08 C9.1@2124.8,3370.08
IN3: C8.1 R8.2 U1.10 | length 488.5
  Top Layer w11.81: U1.10@1574.8,3186.02 1574.8,3292.32 1609.25,3326.77 1777.56,3326.77 1820.87,3370.08 R8.2@1824.8,3370.08 C8.1@1924.8,3370.08
IN4: C7.1 R7.2 U1.11 | length 322.6
  Top Layer w11.81: U1.11@1555.12,3186.02 1555.12,3316.93 1590.55,3352.36 1607.09,3352.36 R7.2@1624.8,3370.08 C7.1@1724.8,3370.08
IN5: C6.1 R6.2 U1.13 | length 287.8
  Top Layer w11.81: R6.2@1424.8,3370.08 C6.1@1524.8,3370.08 1515.75,3361.02 U1.13@1515.75,3186.02
IN6: C3.1 R5.2 U1.14 | length 400
  Top Layer w11.81: R5.2@1224.8,3370.08 C3.1@1324.8,3370.08 1328.74,3370.08 1372.05,3326.77 1444.88,3326.77 1496.06,3275.59 U1.14@1496.06,3186.02
IN7: C2.1 R2.2 U1.15 | length 563.6
  Top Layer w11.81: R2.2@1024.8,3370.08 C2.1@1124.8,3370.08 1128.74,3370.08 1210.43,3288.39 1435.04,3288.39 1476.38,3247.05 U1.15@1476.38,3186.02
IN8: C1.1 R1.2 U1.16 | length 727.7
  Top Layer w11.81: R1.2@824.8,3370.08 C1.1@924.8,3370.08 928.74,3370.08 1042.91,3255.91 1420.28,3255.91 1456.69,3219.49 U1.16@1456.69,3186.02
INT: U9.14 U11.4 | length 1298.6
  Top Layer w10: U9.14@1348.9,1860.24 1424.21,1860.24 1446.85,1837.6 v1(1446.85,1801.65) ; v1(1486.22,1899.61) 1594.49,2007.87 v1(1594.49,2076.77) ; v1(2226.81,2193.15) U11.4@2325.24,2193.15
  Bottom Layer w10: v1(1446.85,1801.65) 1486.22,1841.02 v1(1486.22,1899.61) ; v1(1594.49,2076.77) 1597.85,2080.13 1597.85,2090.83 1598.43,2091.41 1598.43,2149.13 1634.33,2185.04 2157.48,2185.04 2165.59,2193.15 v1(2226.81,2193.15)
LED_IN1: D1.A U1.27 | length 261
  Top Layer w10: D1.A@1417.32,2773.62 1468.55,2773.62 1482.21,2787.28 1529.58,2834.65 1535.43,2840.5 U1.27@1535.43,2955.71
LED_IN2: D2.A U1.26 | length 290.2
  Top Layer w10: D2.A@1359.81,2773.62 1395.25,2809.06 1469.49,2809.06 1515.75,2855.32 U1.26@1515.75,2955.71
LED_IN3: D3.A U1.25 | length 318.1
  Top Layer w10: D3.A@1302.19,2775.48 1303.18,2775.48 1314.04,2786.34 1314.04,2787.32 1356.64,2829.92 1453.94,2829.92 1496.06,2872.05 U1.25@1496.06,2955.71
LED_IN4: D4.A U1.24 | length 353.2
  Top Layer w10: D4.A@1241.84,2773.62 1242.83,2773.62 1255.54,2786.34 1255.54,2787.32 1319.01,2850.79 1444.29,2850.79 1476.38,2882.87 U1.24@1476.38,2955.71
LED_IN5: D5.A U1.23 | length 383.9
  Top Layer w10: D5.A@1183.35,2773.62 1184.34,2773.62 1197.05,2786.34 1197.05,2787.32 1281.38,2871.65 1431.69,2871.65 1456.69,2896.65 U1.23@1456.69,2955.71
LED_IN6: D6.A U1.22 | length 415.2
  Top Layer w10: D6.A@1124.86,2773.62 1125.84,2773.62 1138.56,2786.34 1138.56,2787.32 1243.76,2892.52 1420.08,2892.52 1437.01,2909.45 U1.22@1437.01,2955.71
LED_IN7: D7.A U1.21 | length 448.3
  Top Layer w10: D7.A@1066.37,2773.62 1067.35,2773.62 1080.07,2786.34 1080.07,2787.32 1206.13,2913.39 1411.46,2913.39 1417.32,2919.24 U1.21@1417.32,2955.71
LED_IN8: D8.A U1.20 | length 471.9
  Top Layer w10: D8.A@1008.86,2774.61 1009.84,2774.61 1021.57,2786.34 1021.57,2787.32 1176.18,2941.93 1396.73,2941.93 1397.64,2942.83 U1.20@1397.64,2955.71
LEDL: J22.12 U5.2 | length 2154.5
  Top Layer w10: J22.12@306.09,1355.32 434.06,1227.36 434.06,1153.54 379.92,1099.41 379.92,916.34 428.15,868.11 428.15,825.79 449.8,804.13 506.89,804.13 529.53,826.77 529.53,865.16 585.63,921.26 585.63,994.09 651.08,1059.55 651.08,1203.25 753.94,1306.1 753.94,1370.08 887.8,1503.94 887.8,1750 847.44,1790.35 750,1790.35 720.47,1819.88 720.47,1845.47 654.45,1911.5 632.79,1911.5 U5.2@631.88,1912.4
LEDR: J22.9 R72.2 U5.3 | length 870
  Top Layer w10: U5.3@631.88,1932.09 666.34,1932.09 748.03,1850.39 767.72,1850.39 ; R72.2@767.72,1823.82 767.72,1850.39 ; J22.9@804.13,1355.32 915.35,1466.54 915.35,1824.8 889.76,1850.39 767.72,1850.39
MISO: C14.1 C37.1 R17.1 R28.1 U10.10 | length 2502.1
  Top Layer w10: R28.1@1598.42,1216.54 C37.1@1641.73,1216.54 1641.73,1255.9 1709.65,1323.82 1879.92,1323.82 1898.62,1305.12 1994.09,1305.12 2039.37,1350.39 U10.10@2039.37,1374.02 v1(2039.37,1452.76) ; C14.1@1648.05,2741.17 R17.1@1689.8,2741.17 v1(1689.8,2697.88)
  Bottom Layer w10: v1(1689.8,2697.88) 1783.35,2604.33 1967.52,2604.33 2343.5,2228.35 2343.5,1705.71 2090.55,1452.76 v1(2039.37,1452.76)
MISO_CLT: R17.2 U1.31 | length 198.6
  Top Layer w10: U1.31@1614.17,2955.71 1614.17,2877.95 1681.38,2810.74 1681.38,2796.83 R17.2@1689.8,2788.42
MISO_VNI: R28.2 U2.9 | length 262.6
  Top Layer w10: U2.9@1584.65,912.4 1584.65,1018.7 1598.42,1032.48 R28.2@1598.42,1169.29
MOSI: R14.1 R25.1 U10.13 | length 2241.9
  Top Layer w10: v1(1766.73,2697.88) R14.1@1766.73,2741.17 ; R25.1@1870.07,1216.54 1870.07,1218.5 1898.62,1247.05 2086.02,1247.05 2189.37,1350.39 U10.13@2189.37,1374.02 v1(2189.37,1452.76)
  Bottom Layer w10: v1(1766.73,2697.88) 1798.28,2666.34 2007.87,2666.34 2403.54,2270.67 2403.54,1666.93 v1(2189.37,1452.76)
MOSI_CLT: C11.1 R14.2 U1.33 | length 237.1
  Top Layer w10: U1.33@1653.54,2955.71 1653.54,2878.94 1721.45,2811.03 1721.45,2794.58 C11.1@1727.61,2788.42 R14.2@1766.73,2788.42
MOSI_VNI: C34.1 R25.2 U2.6 | length 423.4
  Top Layer w10: U2.6@1643.7,912.4 1643.7,991.14 1793.31,1140.75 1843.5,1140.75 1870.07,1167.32 R25.2@1870.07,1169.29 C34.1@1913.38,1169.29
NetC25_1: C25.1 R21.2 U2.4 | length 550.4
  Top Layer w10: U2.4@1683.07,912.4 1683.07,972.44 1806.1,1095.47 1979.53,1095.47 2049.41,1165.35 C25.1@2049.41,1169.29 R21.2@2089.56,1169.29
NetC26_1: C26.1 U2.25 | length 345.6
  Top Layer w10: U2.25@1525.59,536.42 1526.5,537.32 1526.5,579.77 1532.35,585.63 1780.51,585.63 1800.28,565.87 1804.21,565.87 1811.02,559.06 C26.1@1811.02,555.12
NetC26_2: C26.2 C33.1 D12.C L1.1 R23.1 U2.24 | length 882.1
  Top Layer w10: U2.24@1505.91,536.42 1505.91,588.58 1519.61,602.28 C26.2@1811.02,602.28 ; C26.2@1811.02,602.36 1835.63,602.36 1882.87,555.12 L1.1@1921.26,555.12 ; L1.1@1921.26,558.07 1962.6,558.07 1987.13,582.6 1987.13,593.43 2043.31,649.61 R23.1@2043.31,700.79 ; L1.1@1962.6,555.12 C33.1@2043.31,555.12 2126.38,555.12 2127.76,553.74 D12.C@2133.86,553.74
NetC27_2: C27.2 R22.1 R23.2 R24.2 U2.22 | length 960.9
  Top Layer w10: U2.22@1466.54,536.42 1466.54,584.65 1501.97,620.08 1765.75,620.08 1783.46,637.8 1834.65,637.8 1850.39,622.05 1988.19,622.05 2007.87,641.73 2007.87,765.75 2005.91,767.72 ; C27.2@1946.82,803.15 1946.82,759.87 R22.1@1954.72,751.97 1954.72,753.94 1968.5,767.72 2005.91,767.72 ; R24.2@2100.39,767.72 R23.2@2043.31,767.72 2005.91,767.72
NetC29_1: C29.1 U2.13 | length 271.9
  Top Layer w10: C29.1@1291.34,852.36 1294.29,849.41 1494.09,849.41 1505.91,861.22 U2.13@1505.91,912.4
NetC30_1: C30.1 U2.14 | length 248.4
  Top Layer w10: C30.1@1291.34,895.67 1295.28,895.67 1323.82,867.13 1480.18,867.13 1486.04,872.98 1486.04,912.22 U2.14@1486.22,912.4
NetC60_1: C60.1 C62.1 L4.4 U8.2
NetC61_1: C61.1 D26.C L4.1
NetC62_2: C62.2 L4.3 U8.1
NetD9_A: D9.A R18.1 | length 49.2
  Top Layer w10: D9.A@1208.66,657.48 R18.1@1208.66,706.69
NetD10_A: D10.A R19.1 | length 49.2
  Top Layer w10: D10.A@1267.72,657.48 R19.1@1267.72,706.69
NetD11_A: D11.A R20.1 | length 49.2
  Top Layer w10: D11.A@1326.77,657.48 R20.1@1326.77,706.69
NetD13_A: D13.A R29.1 | length 52.2
  Top Layer w10: D13.A@1413.39,1231.27 R29.1@1413.38,1283.46
NetD14_A: D14.A R30.1 | length 52.2
  Top Layer w10: D14.A@1355.46,1231.27 R30.1@1355.45,1283.46
NetD15_A: D15.A R31.1 | length 52.2
  Top Layer w10: D15.A@1297.52,1231.27 R31.1@1297.52,1283.46
NetD16_A: D16.A R35.1 | length 52.2
  Top Layer w10: D16.A@1239.59,1231.27 R35.1@1239.59,1283.46
NetD17_A: D17.A R36.1 | length 52.2
  Top Layer w10: D17.A@1181.66,1231.27 R36.1@1181.66,1283.46
NetD18_A: D18.A R37.1 | length 52.2
  Top Layer w10: D18.A@1123.73,1231.27 R37.1@1123.73,1283.46
NetD19_A: D19.A R38.1 | length 52.2
  Top Layer w10: D19.A@1065.8,1231.27 R38.1@1065.8,1283.46
NetD20_A: D20.A R39.1 | length 52.2
  Top Layer w10: D20.A@1007.87,1231.27 R39.1@1007.87,1283.46
NetD22_A: D22.A R46.1 | length 49.2
  Top Layer w10: R46.1@2959.92,968.5 D22.A@2959.92,1017.72
NetD23_A: D23.A R47.1 | length 49.2
  Top Layer w10: R47.1@2809.92,968.5 D23.A@2809.92,1017.72
NetD28_A: D28.A J25.2 | length 394.6
  Top Layer w10: D28.A@865.16,2528.94 v1(865.16,2564.1)
  Bottom Layer w10: v1(865.16,2564.1) 977.28,2451.97 J25.2@1178.15,2451.97
NetD34_C: D34.C R75.2 | length 65.9
  Top Layer w10: R75.2@1496.06,2440.95 D34.C@1496.06,2506.89
NetD35_C: D35.C R76.2 | length 65.9
  Top Layer w10: R76.2@1545.27,2440.95 D35.C@1545.27,2506.89
NetD36_C: D36.C R77.2 | length 65.9
  Top Layer w10: R77.2@1594.49,2440.95 D36.C@1594.49,2506.89
NetD37_C: D37.C R74.2 R78.2 S1.1 | length 635.9
  Top Layer w10: S1.1@1753.94,1446.85 v1(1823.82,1446.85) ; v1(1888.78,1822.85) 1892.14,1826.21 1900.03,1826.21 1934.05,1860.24 R74.2@1936.02,1860.24 R78.2@1982.28,1860.24 D37.C@1982.28,1914.37
  Bottom Layer w10: v1(1823.82,1446.85) 1823.82,1757.89 v1(1888.78,1822.85)
NetF1_1: F1.1 J24.1
NetJ21_2: J21.2 R42.1 | length 125.3
  Top Layer w10: J21.2@2937.48,542.32 2983.27,496.54 R42.1@2983.27,436.03
NetJ22_10: J22.10 R73.2 | length 174.2
  Top Layer w9.84: J22.10@704.13,1355.32 777.76,1428.95 R73.2@777.76,1499.02
NetJ22_11: J22.11 R71.1 | length 174.2
  Top Layer w9.84: R71.1@332.48,1499.02 332.48,1428.93 J22.11@406.09,1355.32
NetR4_2: R4.2 U1.2 | length 180.6
  Top Layer w10: U1.2@1732.52,3186.26 1732.52,3222.49 1738.37,3228.35 1773.62,3228.35 1779.53,3222.44 1779.53,3177.17 1794.37,3162.32 1806.18,3162.32 1814.96,3153.54 R4.2@1814.96,3151.57